# EAGLE board LEDMatrix (EAGLE 9.6.2)
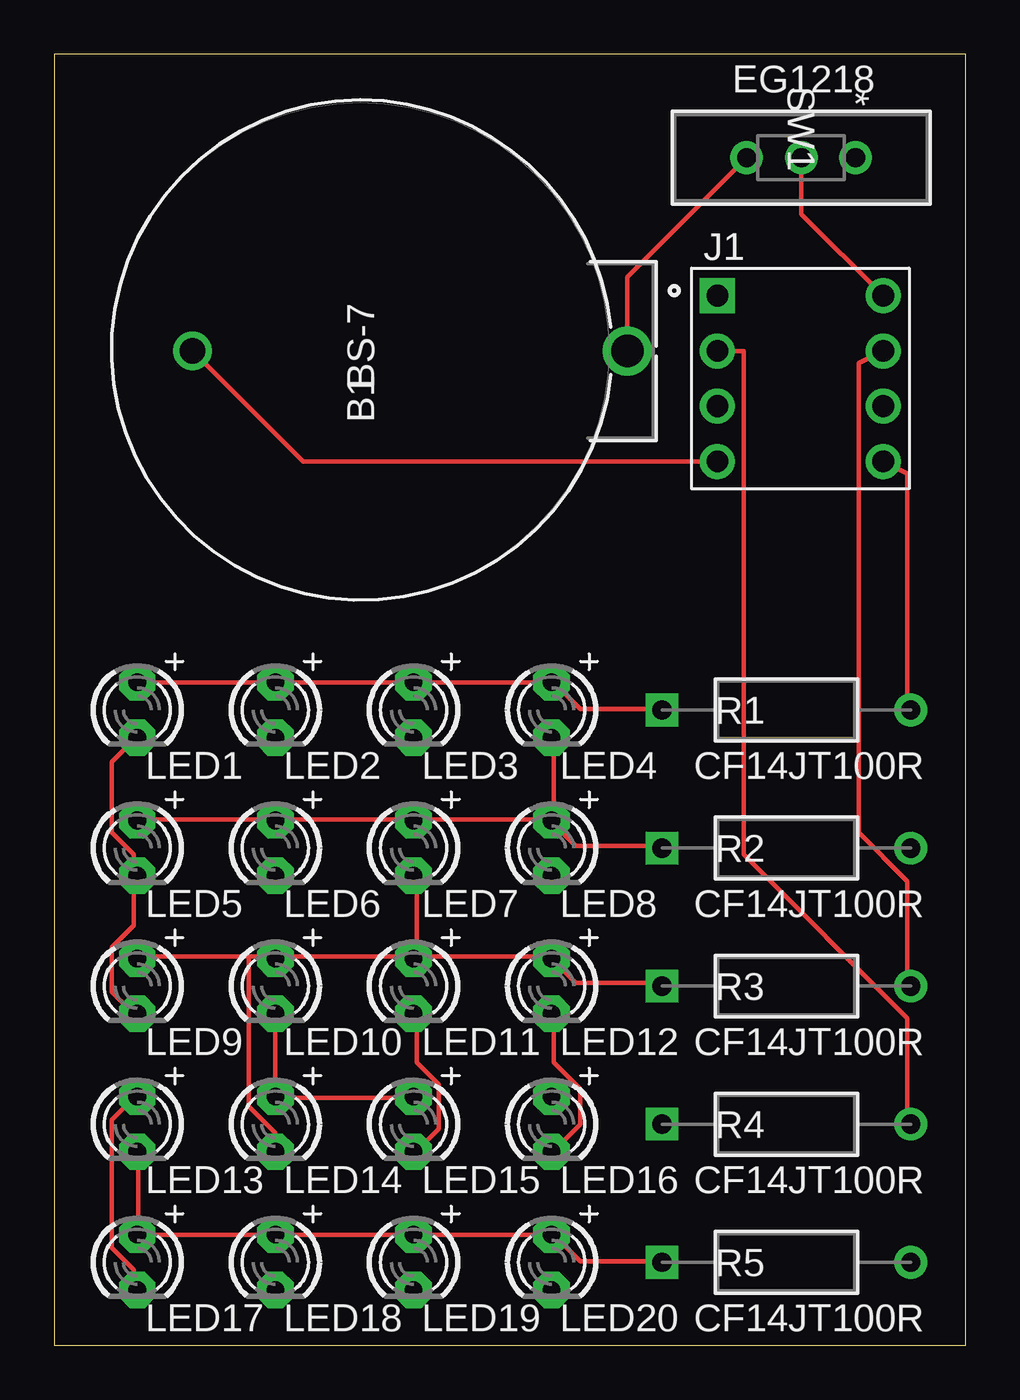
[diagram p0: board, top side]
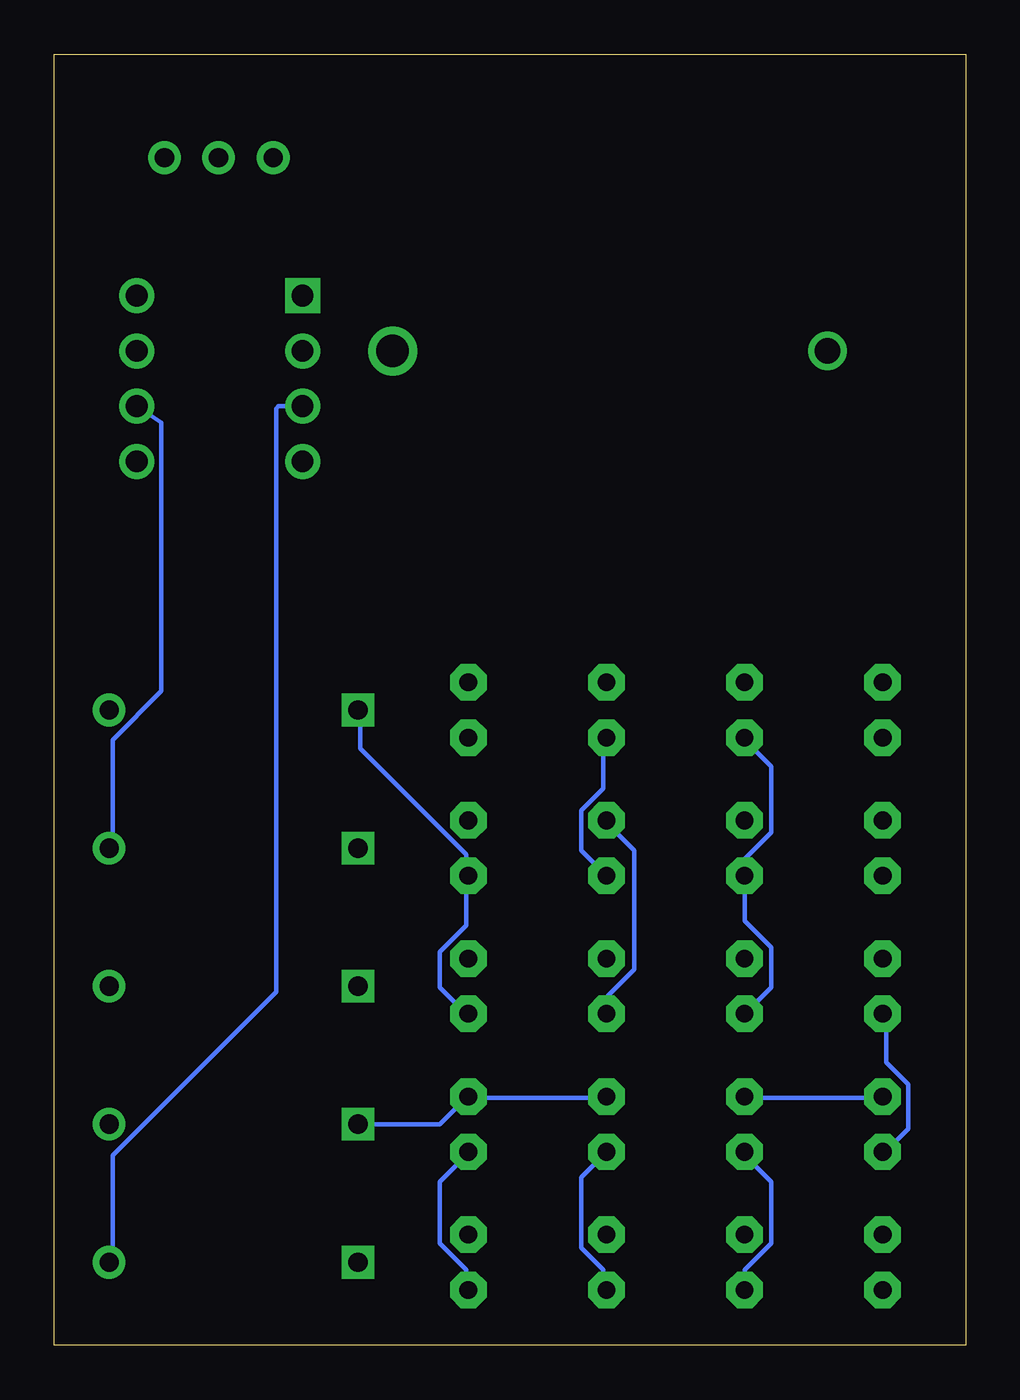
[diagram p1: board, bottom side, seen from below]

Size 41.89 x 59.36 mm. Coordinates in mm from the lower left corner, seen from the top.
Outline: 0,0 41.89,0 41.89,59.36 0,59.36 0,0
Copper layers (1*16): Top 0.035mm / dielectric 1.5mm / Bottom 0.035mm
Design rules "SparkFun": minimum track width 8mil, minimum drill 20mil, track to track 8mil, track to pad 8mil, pad to pad 8mil, via to via 8mil, smd to smd 8mil, copper to edge 8mil, drill to drill 8mil, minimum pad ring 12mil, minimum via ring 10mil, stop-mask expansion 4mil, vias tented up to drill 20mil, thermal gap 10mil

## Footprints (pad centres in the part's own frame; a part is rotated, then mirrored left to right if it is on the bottom)
BS-7_MPD = drill 1.168 pad 1.676: 1 0,0 | drill 1.499 pad 2.007: 2 0,-19.99
TE_1-2199298-2 = drill 1 square: 1 -3.81,3.81 | drill 1: 2 -3.81,1.27; 3 -3.81,-1.27; 4 -3.81,-3.81; 5 3.81,-3.81; 6 3.81,-1.27; 7 3.81,1.27; 8 3.81,3.81
LED3MM = drill 0.813 pad 1.676 octagon: A -1.27,0; K 1.27,0
STA_CF14_STP = drill 0.889 pad 1.397 square: 1 0,0 | drill 0.889 pad 1.397: 2 11.43,0
SW_1218_EWI = drill 0.889 pad 1.397: 1 0,0; 2 0,-2.489; 3 0,-5.004

## Placement (x,y rotation side)
B1  BS-7  [BS-7_MPD]  6.35,45.72 90 top
J1  1-2199298-2  [TE_1-2199298-2]  34.29,44.45 0 top
LED1  [LED3MM]  3.81,29.21 270 top
LED2  [LED3MM]  10.16,29.21 270 top
LED3  [LED3MM]  16.51,29.21 270 top
LED4  [LED3MM]  22.86,29.21 270 top
LED5  [LED3MM]  3.81,22.86 270 top
LED6  [LED3MM]  10.16,22.86 270 top
LED7  [LED3MM]  16.51,22.86 270 top
LED8  [LED3MM]  22.86,22.86 270 top
LED9  [LED3MM]  3.81,16.51 270 top
LED10  [LED3MM]  10.16,16.51 270 top
LED11  [LED3MM]  16.51,16.51 270 top
LED12  [LED3MM]  22.86,16.51 270 top
LED13  [LED3MM]  3.81,10.16 270 top
LED14  [LED3MM]  10.16,10.16 270 top
LED15  [LED3MM]  16.51,10.16 270 top
LED16  [LED3MM]  22.86,10.16 270 top
LED17  [LED3MM]  3.81,3.81 270 top
LED18  [LED3MM]  10.16,3.81 270 top
LED19  [LED3MM]  16.51,3.81 270 top
LED20  [LED3MM]  22.86,3.81 270 top
R1  CF14JT100R  [STA_CF14_STP]  27.94,29.21 0 top
R2  CF14JT100R  [STA_CF14_STP]  27.94,22.86 0 top
R3  CF14JT100R  [STA_CF14_STP]  27.94,16.51 0 top
R4  CF14JT100R  [STA_CF14_STP]  27.94,10.16 0 top
R5  CF14JT100R  [STA_CF14_STP]  27.94,3.81 0 top
SW1  EG1218  [SW_1218_EWI]  36.83,54.61 270 top

## Library data of the parts
B1 = BS-7; BUILT_BY: EMA_Cory; COPYRIGHT: Copyright (C) 2018 Accelerated Designs. All rights reserved; DATASHEET: http://www.memoryprotectiondevices.com/datasheets/BS-7-datasheet.pdf; MANUFACTURER_PART_NUMBER: BS-7; SOURCELIBRARY: Memory_Protection_Devices_2020-03-04; VENDOR: Memory Protection Devices, Inc
J1 = 8pinsocket; COMMENT: 1-2199298-2; DESCRIPTION: 8 (2 x 4) Pos DIP, 0.3 (7.62mm) Row Spacing Socket Tin Through Hole; DIGI-KEY_PART_NUMBER: A120347-ND; MF: TE Connectivity; MP: 1-2199298-2; PACKAGE: None; PURCHASE-URL: https://pricing.snapeda.com/search/part/1-2199298-2/?ref=eda
LED1-LED20 = adafruit
R1-R5 = 100Resistor; BUILT_BY: EMA_UL_Team; MANUFACTURER_PART_NUMBER: CF14JT100R; SOURCELIBRARY: Stackpole_2014-12-31; VENDOR: Stackpole International
SW1 = EG1218; BUILT_BY: EMA_Matt; COPYRIGHT: Copyright (C) 2018 Accelerated Designs. All rights reserved; DATASHEET: https://datasheet.octopart.com/EG1218-E-Switch-datasheet-13225248.pdf; MANUFACTURER_PART_NUMBER: EG1218; SOURCELIBRARY: E-Switch_2020-04-02; VENDOR: E-Switch

## Nets
GND: B1.1 J1.4
MISO: J1.6 R2.2
MOSI: J1.5 R1.2
N$1: LED1.A LED2.A LED3.A LED4.A LED8.K LED12.K LED16.K LED20.K R1.1
N$2: LED4.K LED5.A LED6.A LED7.A LED8.A LED11.K LED15.K LED19.K R2.1
N$3: LED3.K LED7.K LED9.A LED10.A LED11.A LED12.A LED14.K LED18.K R3.1
N$4: LED2.K LED6.K LED10.K LED13.A LED14.A LED15.A LED16.A LED17.K R4.1
N$5: LED1.K LED5.K LED9.K LED13.K LED17.A LED18.A LED19.A LED20.A R5.1
N$7: B1.2 SW1.3
PB3: J1.2 R4.2
PB4: J1.3 R5.2
SCK: J1.7 R3.2
VCC: J1.8 SW1.2

## Tracks (layer width: path | path; a pad name or v marks a point on that pad's centre or on a via)
GND
  Top 0.203: J1.4 11.43,40.64 B1.1
MISO
  Bottom 0.203: R2.2 39.22,22.96 39.22,27.84 36.98,30.07 36.98,42.44 J1.6
MOSI
  Top 0.203: R1.2 39.22,29.26 39.22,40.08 J1.5
N$1
  Top 0.203: LED12.K 22.96,15.24 22.96,13.01 24.18,11.79 24.18,10.16 22.96,8.94 LED16.K | LED1.A LED2.A LED3.A LED4.A 22.96,30.48 24.18,29.26 27.84,29.26 R1.1
  Bottom 0.203: LED20.K 22.96,2.64 22.96,3.45 24.18,4.67 24.18,7.52 22.96,8.74 LED16.K | LED12.K 22.96,15.24 24.18,16.46 24.18,18.09 22.96,19.3 22.96,21.54 LED8.K 22.96,21.74 22.96,22.55 27.84,27.43 27.84,29.06 R1.1
N$2
  Top 0.203: LED11.K 16.66,15.24 16.66,13.01 17.68,11.99 17.68,9.96 16.66,8.94 LED15.K | 10.16,24.18 3.86,24.18 LED5.A | R2.1 27.84,22.96 23.98,22.96 22.96,23.98 LED8.A | LED8.A 22.76,24.18 16.66,24.18 LED7.A 16.46,24.18 10.16,24.18 | LED4.K 22.96,27.84 22.96,24.18 LED8.A | 10.16,24.18 LED6.A
  Bottom 0.203: LED15.K 17.68,7.72 17.68,4.47 16.66,3.45 16.66,2.64 LED19.K | LED11.K 16.46,15.24 16.46,16.05 15.24,17.27 15.24,22.76 16.46,23.98 LED7.A
N$3
  Top 0.203: 10.16,17.88 8.94,17.88 | 8.94,17.88 3.86,17.88 LED9.A | R3.1 27.84,16.66 23.98,16.66 LED12.A 22.76,17.88 16.66,17.88 | 16.66,17.88 16.66,21.54 LED7.K | 16.66,17.88 LED11.A 16.46,17.88 10.16,17.88 | 10.16,17.88 LED10.A | LED14.K 10.16,9.75 8.94,10.97 8.94,17.88
  Bottom 0.203: LED18.K 10.16,3.45 8.94,4.67 8.94,7.52 10.16,8.74 LED14.K | LED7.K 17.68,22.76 17.68,24.59 16.66,25.6 16.66,27.84 LED3.K
N$4
  Top 0.203: LED17.K 3.66,2.64 3.66,3.45 2.64,4.47 2.64,10.36 3.66,11.38 LED13.A | LED10.K LED14.A 10.16,11.38 16.46,11.38 LED15.A
  Bottom 0.203: LED2.K 10.16,27.84 8.94,26.62 8.94,23.57 10.16,22.35 LED6.K 10.16,19.51 8.94,18.29 8.94,16.46 LED10.K | R4.1 24.18,10.16 22.96,11.38 LED16.A 22.76,11.38 16.66,11.38 LED15.A | LED13.A 3.86,11.38 10.16,11.38 LED14.A
N$5
  Top 0.203: R5.1 27.84,3.86 24.18,3.86 22.96,5.08 LED20.A LED19.A LED18.A 3.86,5.08 | LED1.K 3.66,27.84 2.64,26.82 2.64,23.57 3.66,22.55 3.66,21.74 LED5.K 3.66,21.54 3.66,19.3 2.64,18.29 2.64,16.26 3.66,15.24 LED9.K | 3.86,5.08 3.86,8.74 LED13.K | 3.86,5.08 LED17.A
  Bottom 0.203: LED9.K 3.66,15.24 3.66,13.01 2.64,11.99 2.64,9.96 3.66,8.94 LED13.K
N$7
  Top 0.203: B1.2 26.34,49.12 SW1.3
PB3
  Top 0.203: R4.2 39.22,10.16 39.22,15.04 31.7,22.55 31.7,45.72 J1.2
PB4
  Bottom 0.203: R5.2 39.22,3.86 39.22,8.74 31.7,16.26 31.7,43.08 31.6,43.18 J1.3
SCK
  Top 0.203: R3.2 39.22,16.66 39.22,21.34 36.98,23.57 36.98,45.16 J1.7
VCC
  Top 0.203: J1.8 34.34,52.02 SW1.2